# Altium PCB 拓展板.PcbDoc
Units mil, origin at the board's own origin, x right, y up, seen from the top; angles counter-clockwise.
Board outline 3450 x 2375 mil, 2 copper layers (Top Layer, Bottom Layer); 10 components, 64 nets, 169 pads, 23 vias.
Unrouted connection lines stored in the file: 2.
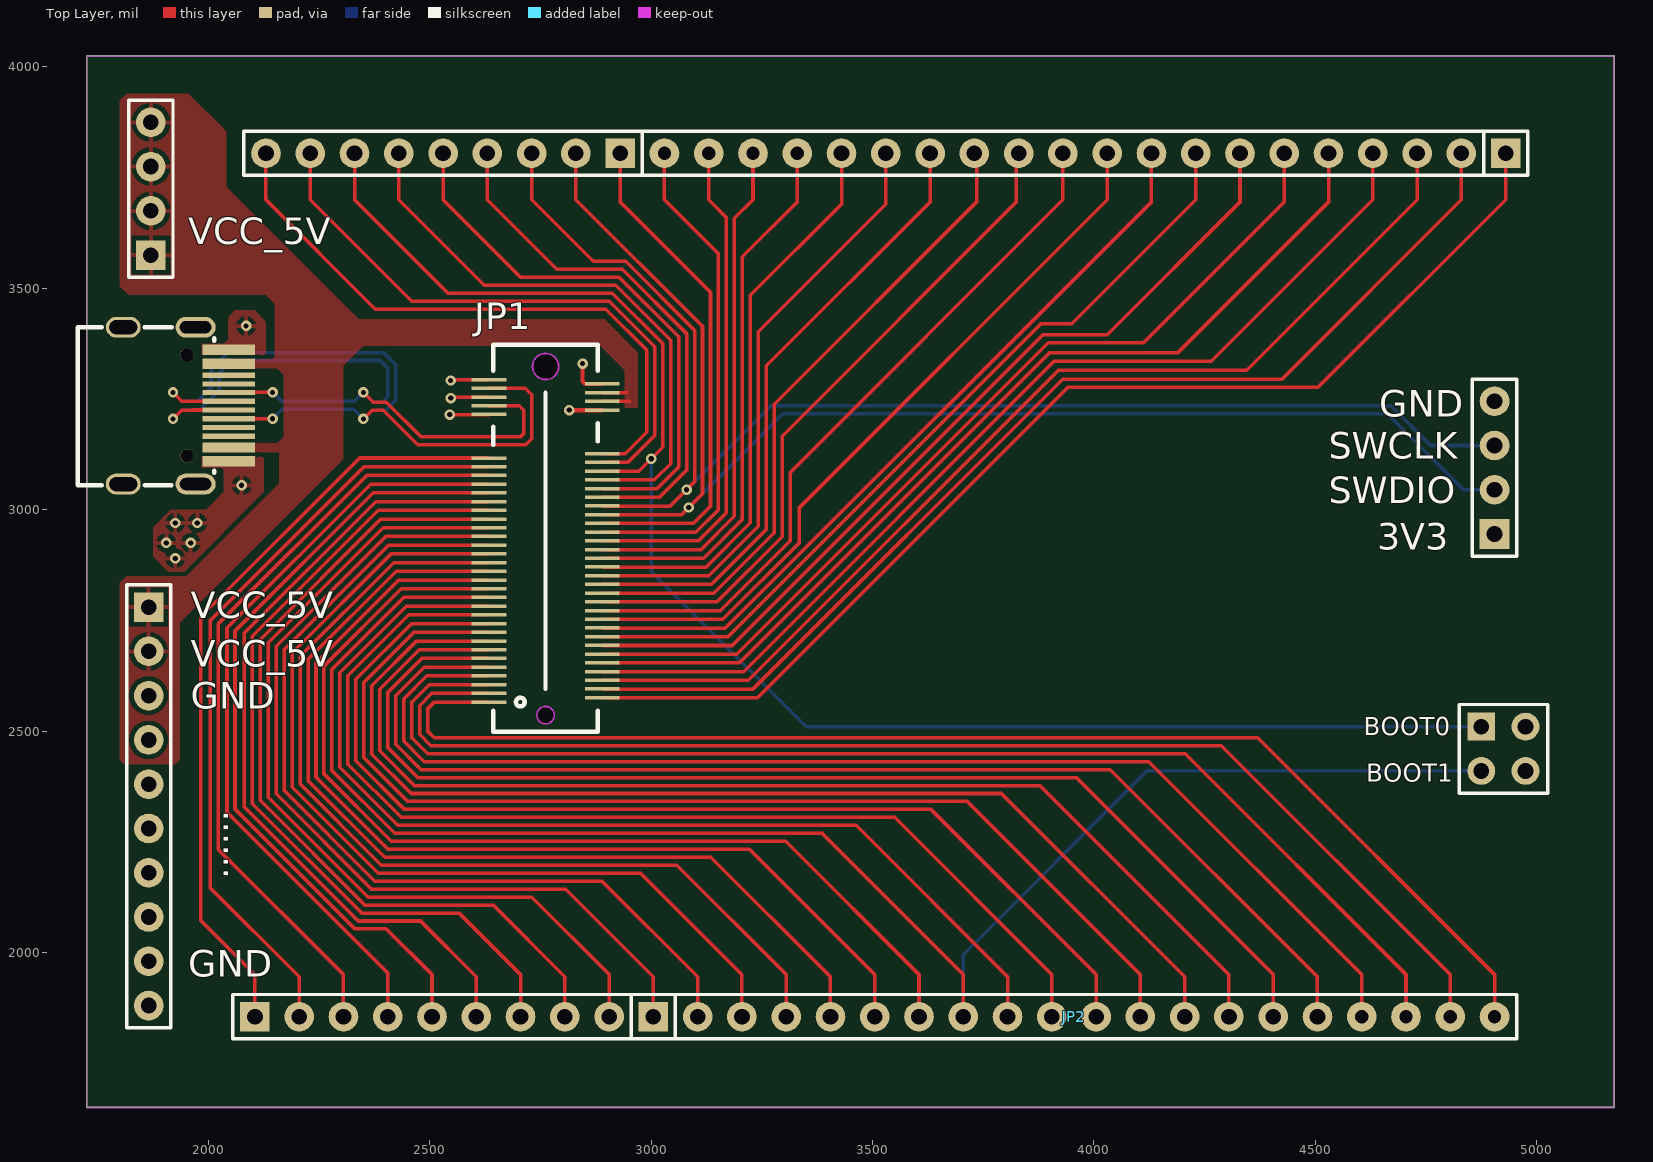
[diagram p0: Top Layer view]
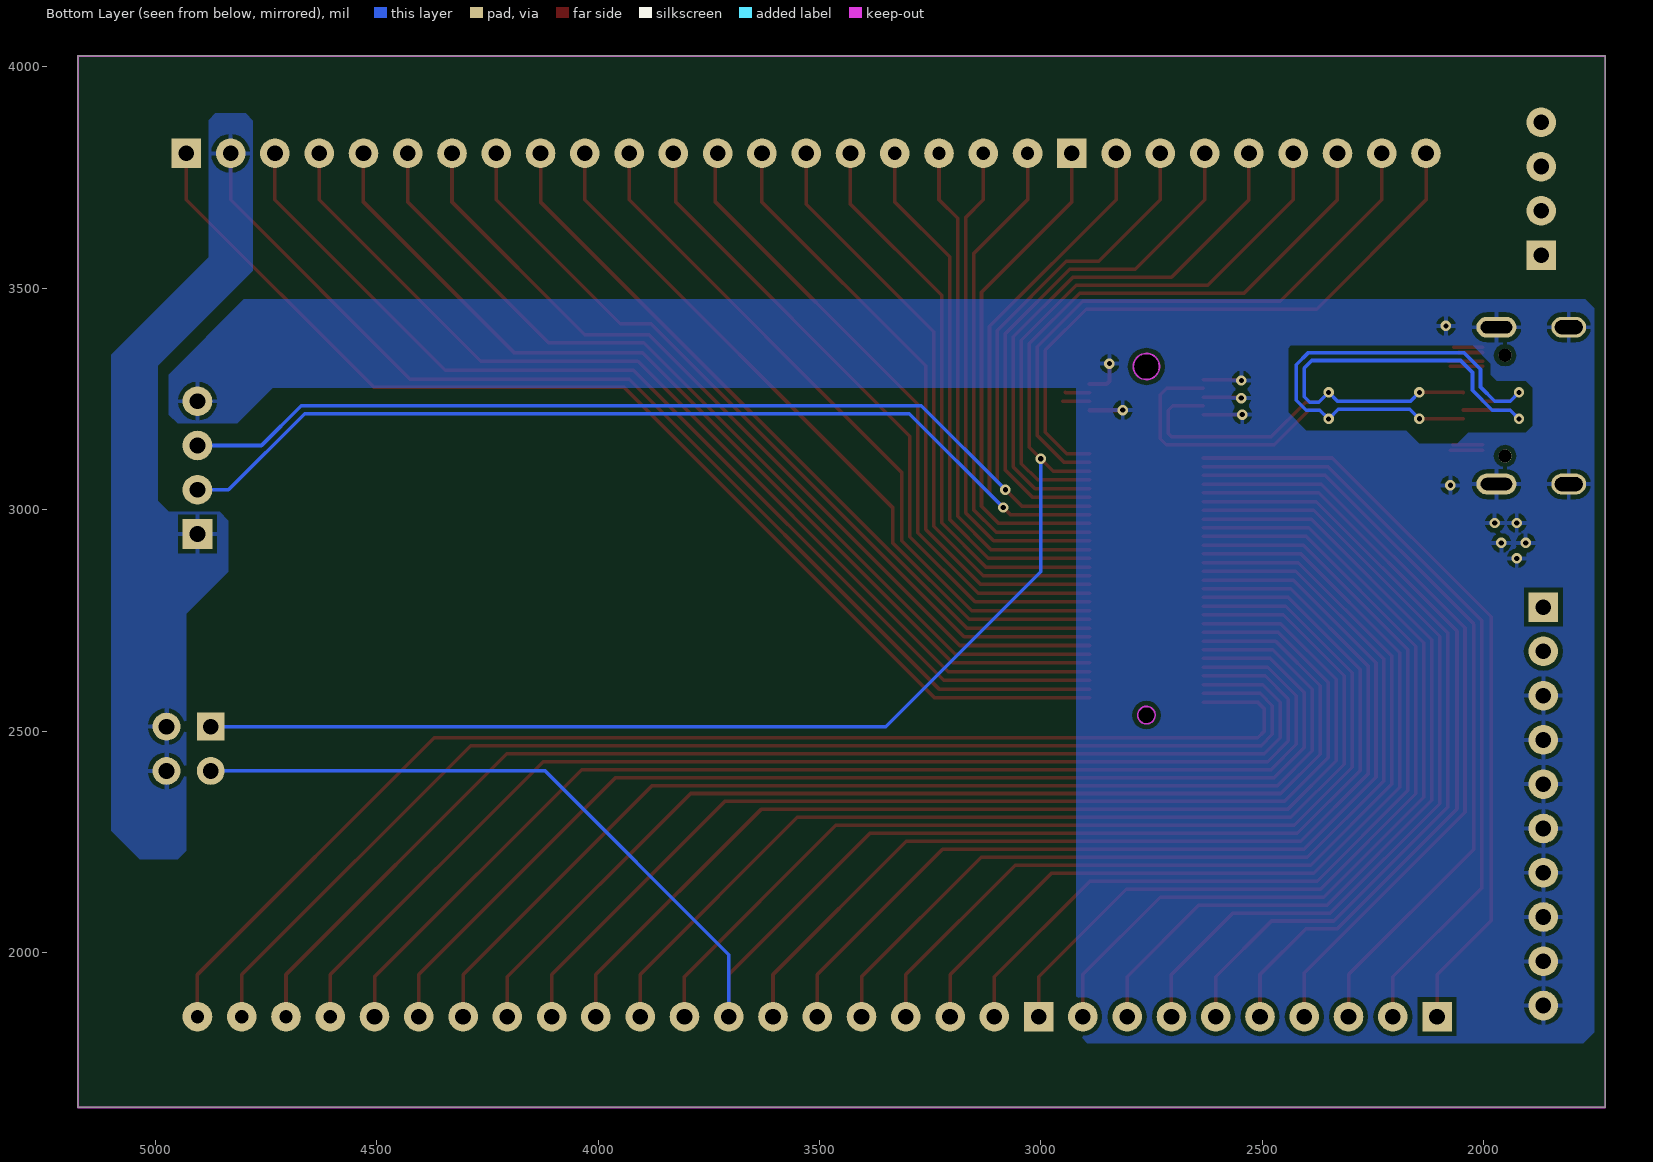
[diagram p1: Bottom Layer view, seen from below]

## Layer stack, top to bottom
Top Solder: solder mask 0.4, Solder Resist, Dk 3.5
Top Layer: signal copper 1.4
Dielectric 1: dielectric 12.6, FR-4, Dk 4.8
Bottom Layer: signal copper 1.4
Bottom Solder: solder mask 0.4, Solder Resist, Dk 3.5

## Board outline
1725,1845 1725,4025 5175,4025 5175,1650 1725,1650

## Design rules (kind name [scope] priority, off if disabled: settings)
Clearance [All] p1: gap=10 ignorepadtopadclearanceinfootprint=FALSE except(0: Arc-Hole Track-Hole SMDPad-Hole THPad-Hole Via-Hole Fill-Hole Poly-Hole Region-Hole Text-Hole)
PolygonConnect [All] p1: connectstyle=Relief reliefconductorwidth=10 reliefentries=4 polygonreliefangle="90 Angle" airgapwidth=10
RoutingVias [All] p1: holewidth=28 width=50 viastyle="Through Hole" minholewidth=28 minwidth=50 maxholewidth=28 maxwidth=50
SolderMaskExpansion [All] p1: expansion=4 istentingtop=FALSE
Width [All] p1: maxlimit=10 minlimit=8 preferedwidth=8 minimp=50.000000 maximp=50.000000 favimp=50.000000
30 further rules are at their usual default settings.

## Components (designator, comment, footprint, x,y, rotation, side; value= is the part's Value field where it differs from the comment)
JP1 "M.2-M-BASE" M.2-MKEY-LI-底座 2554.8,2565.55 r90 top
JP2 "HDR-1X20" HDR2.54-LI-20P 3955,1855 r0 top
JP3 "HDR-1X20" HDR2.54-LI-20P 3980,3805 r180 top
JP4 "HDR-1X9" HDR2.54-LI-9P 2505,1855 r0 top
JP5 "HDR-1X9" HDR2.54-LI-9P 2530,3805 r180 top
JP6 "HDR-1X10" HDR2.54-LI-10P 1865,2330 r270 top
JP7 "HDR-1X4" HDR2.54-LI-4P 1870,3725 r90 top
JP8 "Header2X2" HDR2.54-LI-2x2P 4925,2460 r270 top
JP9 "HDR-1X4" HDR2.54-LI-4P 4905,3095 r90 top
USBC1 "TYPE-C 2.0 -16P" USB-C-SMD_16P 1905,3235 r90 top

## Footprints (in the part's own frame and the unit in brackets; to place one, negate y for a bottom-side part, rotate by r counter-clockwise, add the part's x,y. Pads: shape width x height; smd on the part's side, far side on the other; paste and mask are expansions set on the pad)
HDR2.54-LI-2x2P [mm] "双排排针，2x2脚"
  rect 1.6x1.6 hole 0.9: 1(-1.27,-1.27)
  round 1.6 hole 0.9: 2(-1.27,1.27) 3(1.27,-1.27) 4(1.27,1.27)
  silkscreen extent -2.54,-2.54 2.54,2.54, body extent -2.54,-2.54 2.54,2.54, height 8.5
HDR2.54-LI-4P [mm] "排针，4脚"
  rect 1.7x1.7 hole 0.9: 1(-3.81,0)
  round 1.7 hole 0.9: 2(-1.27,0) 3(1.27,0) 4(3.81,0)
  silkscreen extent -5.08,-1.27 5.08,1.27, body extent -5.08,-1.27 5.08,1.27, height 2.54
HDR2.54-LI-9P [mm] "排针，9脚"
  rect 1.7x1.7 hole 0.9: 1(-10.16,0)
  round 1.7 hole 0.9: 2(-7.62,0) 3(-5.08,0) 4(-2.54,0) 5(0,0) 6(2.54,0) 7(5.08,0) 8(7.62,0) 9(10.16,0)
  silkscreen extent -11.43,-1.27 11.43,1.27, body extent -11.43,-1.27 11.43,1.27, height 2.54
HDR2.54-LI-10P [mm] "排针，10脚   淘宝ID:黄晶宝石   店铺网址:https://shop463601444.taobao.com"
  rect 1.7x1.7 hole 0.9: 1(-11.43,0)
  round 1.7 hole 0.9: 2(-8.89,0) 3(-6.35,0) 4(-3.81,0) 5(-1.27,0) 6(1.27,0) 7(3.81,0) 8(6.35,0) 9(8.89,0) 10(11.43,0)
  silkscreen extent -12.7,-1.27 12.7,1.27, body extent -12.7,-1.27 12.7,1.27, height 2.54
HDR2.54-LI-20P [mm] "排针，20脚"
  rect 1.7x1.7 hole 0.9: 1(-24.13,0)
  round 1.7 hole 0.9: 2(-21.59,0) 3(-19.05,0) 4(-16.51,0) 5(-13.97,0) 6(-11.43,0) 7(-8.89,0) 8(-6.35,0) 9(-3.81,0) 10(-1.27,0) 11(1.27,0) 12(3.81,0) 13(6.35,0) 14(8.89,0) 15(11.43,0) 16(13.97,0)
  round 1.7 hole 0.762: 17(16.51,0) 18(19.05,0) 19(21.59,0) 20(24.13,0)
  silkscreen extent -25.4,-1.27 25.4,1.27, body extent -25.4,-1.27 25.4,1.27, height 2.54
M.2-MKEY-LI-底座 [mm] "立式"
  rect 0.2x2 smd: 1(0,-2) 2(0.25,-8.5) 3(0.5,-2) 4(0.75,-8.5) 5(1,-2) 6(1.25,-8.5) 7(1.5,-2) 8(1.75,-8.5) 9(2,-2) 10(2.25,-8.5) 11(2.5,-2) 12(2.75,-8.5) 13(3,-2) 14(3.25,-8.5) 15(3.5,-2) 16(3.75,-8.5) 17(4,-2) 18(4.25,-8.5) 19(4.5,-2) 20(4.75,-8.5) 21(5,-2) 22(5.25,-8.5) 23(5.5,-2) 24(5.75,-8.5) 25(6,-2) 26(6.25,-8.5) 27(6.5,-2) 28(6.75,-8.5) 29(7,-2) 30(7.25,-8.5) 31(7.5,-2) 32(7.75,-8.5) 33(8,-2) 34(8.25,-8.5) 35(8.5,-2) 36(8.75,-8.5) 37(9,-2) 38(9.25,-8.5) 39(9.5,-2) 40(9.75,-8.5) 41(10,-2) 42(10.25,-8.5) 43(10.5,-2) 44(10.75,-8.5) 45(11,-2) 46(11.25,-8.5) 47(11.5,-2) 48(11.75,-8.5) 49(12,-2) 50(12.25,-8.5) 51(12.5,-2) 52(12.75,-8.5) 53(13,-2) 54(13.25,-8.5) 55(13.5,-2) 56(13.75,-8.5) 57(14,-2) 58(14.25,-8.5) 59(16.5,-2) 60(16.75,-8.5) 61(17,-2) 62(17.25,-8.5) 63(17.5,-2) 64(17.75,-8.5) 65(18,-2) 66(18.25,-8.5) 67(18.5,-2)
  Keep-Out Layer circle w0.1: c-0.75,-5.25 r0.5
  Keep-Out Layer circle w0.1: c19.25,-5.25 r0.75
  silkscreen extent -1.7,-8.25 20.5,-2.25
USB-C-SMD_16P [mm] "封装库来自淘宝ID:黄晶宝石"
  oval 1.2x2.3 hole 0.7 slot 1.8 at 90 deg: 0(-4.5,-1.675) 0(4.5,-1.675)
  oval 1.2x2 hole 0.8 slot 1.6 at 90 deg: 0(-4.5,2.475) 0(4.5,2.475)
  rect 0.3x3 smd: A1(3.35,-3.573) A4(2.55,-3.573) A5(1.25,-3.573) A6(0.25,-3.573) A7(-0.25,-3.573) A8(1.75,-3.573) A9(-2.55,-3.573) A12(-3.35,-3.573) B1(-3.05,-3.573) B4(-2.25,-3.573) B5(-1.75,-3.573) B6(-0.75,-3.573) B7(0.75,-3.573) B8(-1.25,-3.573) B9(2.25,-3.573) B12(3.05,-3.573)
  round 0.75 hole 0.75 unplated: ""(-2.89,-1.175) ""(2.89,-1.175)
  silkscreen extent -4.56,-2.75 4.5,5.08, body extent -4.44,-2.87 4.5,5.03, height 3.25

## Part data
JP1: library part M.2-M底座, "M.2-M底座"
JP2 JP3: library part "Header 20", "20P接插件", BOM名称=20P接插件, 封装库来自淘宝卖家 ID：黄晶宝石=其他店铺购入均为盗, 联系卖家，免费查找封装=唯一出售店铺网址https://shop463601444.taobao.c
JP4 JP5: library part "Header 9", "9P接插件", BOM名称=9P接插件, 封装库来自淘宝卖家 ID：黄晶宝石=其他店铺购入均为盗, 联系卖家，免费查找封装=唯一出售店铺网址https://shop463601444.taobao.c
JP6: library part "Header 10", "10P接插件"
JP7 JP9: library part "Header 4", "4P接插件", BOM名称=4P接插件, 封装库来自淘宝卖家 ID：黄晶宝石=其他店铺购入均为盗, 联系卖家，免费查找封装=唯一出售店铺网址https://shop463601444.taobao.c
JP8: library part "Header 2X2", "2*2P接插件"
USBC1: library part USB2.0_Type-C_16Pin, "USB2.0 Type-C 16Pin  母座"

## Via types
v1: diameter 23.62, hole 11.81, Top Layer to Bottom Layer, 21 vias
v2: diameter 59.06, hole 59.06, Top Layer to Bottom Layer, 1 vias
v3: diameter 39.37, hole 39.37, Top Layer to Bottom Layer, 1 vias

## Nets (pads, with @x,y where several pads share a name; then routed paths per layer and width w, separated by ;. In a path a pad name is that pad's centre, name@x,y a point inside that pad or via, vN(x,y) a via of type N, cw(c..) or ccw(c..) an arc to the next point about the centre after c; other vN are vias at no path point)
+3.3V: JP1.4 JP3.2 JP8.2 JP8.4 JP9.1 | length 2503.1
  Top Layer w8: JP1.4@2889.65,2594.88 3229.88,2594.88 3930,3295 4425,3295 4830,3700 JP3.2
+5: JP1.62 JP1.64 JP6.1 JP6.2 JP7.1 JP7.2 JP7.3 JP7.4 USBC1.A4 USBC1.A9 USBC1.B4 USBC1.B9 | length 406.8
  Top Layer w8: USBC1.B9@2002.27,3323.58 USBC1.B9@2075,3323.58 ; USBC1.A4@2002.27,3335.39 USBC1.A4@2080,3335.39 ; USBC1.A9@2002.43,3134.61 USBC1.A9@2075,3134.61 ; USBC1.B4@2002.43,3146.42 USBC1.B4@2070,3146.42 ; JP1.62@2889.65,3244.49 2949.49,3244.49 2950,3245 ; JP1.64@2889.65,3264.17 2944.17,3264.17 2945,3265
BOOT0: JP1.54 JP5.7 JP8.1 | length 3603.6
  Top Layer w8: JP5.7 2330,3700 2541,3489 2912.48,3489 3026,3375.48 3026,3141 v1(3000,3115) 2972.01,3087.01 JP1.54@2889.65,3087.01
  Bottom Layer w8: v1(3000,3115) 3000,2860 3350,2510 JP8.1
BOOT1: JP1.25 JP2.8 JP8.3 | length 3844.4
  Top Layer w8: JP1.25 2441.3,2801.77 2279,2639.47 2279,2410.53 2420.53,2269 3386,2269 3705,1950 JP2.8
  Bottom Layer w8: JP2.8 3705,1995 4120,2410 JP8.3
GND: JP1.59 JP1.60 JP1.63 JP1.66 JP1.67 JP6.3 JP6.4 JP6.5 JP6.6 JP6.7 JP6.8 JP6.9 JP6.10 JP9.4 USBC1.0 USBC1.A1 USBC1.A12 USBC1.B1 USBC1.B12 | length 543.9
  Top Layer w8: USBC1.B12@2002.37,3355.08 USBC1.B12 USBC1.B12@2055.85,3355.08 ; USBC1.A1@2002.37,3366.89 USBC1.A1 USBC1.A1@2067.66,3366.89 ; v1(2545.04,3214.96) JP1.59@2633.54,3214.96 ; v1(2546.85,3291.85) 2548.7,3293.7 JP1.67@2633.54,3293.7 ; v1(2547.17,3252.17) 2549.33,3254.33 JP1.63@2633.54,3254.33
  Top Layer w10: v1(2815,3225) JP1.60 JP1.60@2889.65,3224.8 ; v1(2845,3329.94) 2845,3290 2851.14,3283.86 JP1.66@2889.65,3283.86
  other v1: 1925,2890 1905,2925 1960,2925 1925,2970 1975,2970 2075,3055 2085,3415
NetJP1_1: JP1.1 JP2.20 | length 2927.8
  Top Layer w8: JP1.1 2510.55,2565.55 2495,2550 2495,2500 2510,2485 4370,2485 4905,1950 JP2.20
NetJP1_2: JP1.2 JP3.1 | length 2611.3
  Top Layer w8: JP1.2@2889.65,2575.2 3240.2,2575.2 3942,3277 4507,3277 4930,3700 JP3.1
NetJP1_3: JP1.3 JP2.19 | length 2880.7
  Top Layer w8: JP1.3 2504.78,2585.24 2477,2557.46 2477,2492.54 2502.54,2467 4288,2467 4805,1950 JP2.19
NetJP1_5: JP1.5 JP2.18 | length 2833.6
  Top Layer w8: JP1.5 2499.01,2604.92 2459,2564.91 2459,2485.09 2495.09,2449 4206,2449 4705,1950 JP2.18
NetJP1_6: JP1.6 JP3.3 | length 2395
  Top Layer w8: JP1.6@2889.65,2614.57 3219.57,2614.57 3920,3315 4345,3315 4730,3700 JP3.3
NetJP1_7: JP1.7 JP2.17 | length 2786.5
  Top Layer w8: JP1.7 2493.24,2624.61 2441,2572.37 2441,2477.63 2487.63,2431 4124,2431 4605,1950 JP2.17
NetJP1_8: JP1.8 JP3.4 | length 2286.8
  Top Layer w8: JP1.8@2889.65,2634.25 3209.25,2634.25 3910,3335 4265,3335 4630,3700 JP3.4
NetJP1_9: JP1.9 JP2.16 | length 2736.4
  Top Layer w8: JP1.9 2487.47,2644.29 2423,2579.82 2423,2470.18 2480.18,2413 4037,2413 4505,1945 JP2.16
NetJP1_10: JP1.10 JP3.5 | length 2181.6
  Top Layer w8: JP1.10@2889.65,2653.94 3199.39,2653.94 3900.46,3355 4190,3355 4530,3695 JP3.5
NetJP1_11: JP1.11 JP2.15 | length 2692.2
  Top Layer w8: JP1.11 2481.7,2663.98 2405,2587.28 2405,2462.72 2472.72,2395 3960,2395 4405,1950 JP2.15
NetJP1_12: JP1.12 JP3.6 | length 2073.4
  Top Layer w8: JP1.12@2889.65,2673.62 3193.62,2673.62 3897,3377 4112,3377 4430,3695 JP3.6
NetJP1_13: JP1.13 JP2.14 | length 2645.1
  Top Layer w8: JP1.13 2475.93,2683.66 2387,2594.73 2387,2455.27 2465.27,2377 3878,2377 4305,1950 JP2.14
NetJP1_14: JP1.14 JP3.7 | length 1965.3
  Top Layer w8: JP1.14@2889.65,2693.31 3183.31,2693.31 3885,3395 4030,3395 4330,3695 JP3.7
NetJP1_15: JP1.15 JP2.13 | length 2595.1
  Top Layer w8: JP1.15 2470.16,2703.35 2369,2602.19 2369,2447.81 2457.81,2359 3791,2359 4205,1945 JP2.13
NetJP1_16: JP1.16 JP3.8 | length 1854.2
  Top Layer w8: JP1.16@2889.65,2712.99 3173.45,2712.99 3880.46,3420 3950,3420 4230,3700 JP3.8
NetJP1_17: JP1.17 JP2.12 | length 2550.9
  Top Layer w8: JP1.17 2464.39,2723.03 2351,2609.65 2351,2440.35 2450.35,2341 3714,2341 4105,1950 JP2.12
NetJP1_18: JP1.18 JP3.9 | length 1749
  Top Layer w8: JP1.18@2889.65,2732.68 3167.68,2732.68 4130,3695 JP3.9
NetJP1_19: JP1.19 JP2.11 | length 2503.8
  Top Layer w8: JP1.19 2458.61,2742.72 2333,2617.1 2333,2432.9 2442.9,2323 3632,2323 4005,1950 JP2.11
NetJP1_20: JP1.20 JP3.10 | length 1684.5
  Top Layer w8: JP1.20@2889.65,2752.36 3161.91,2752.36 3335,2925.46 3335,3005 4030,3700 JP3.10
NetJP1_21: JP1.21 JP2.10 | length 2456.7
  Top Layer w8: JP1.21 2452.84,2762.4 2315,2624.56 2315,2425.44 2435.44,2305 3550,2305 3905,1950 JP2.10
NetJP1_22: JP1.22 JP3.11 | length 1620
  Top Layer w8: JP1.22@2889.65,2772.05 3156.14,2772.05 3314,2929.91 3314,3084 3930,3700 JP3.11
NetJP1_23: JP1.23 JP2.9 | length 2406.7
  Top Layer w8: JP1.23 2447.07,2782.09 2297,2632.01 2297,2417.99 2427.99,2287 3463,2287 3805,1945 JP2.9
NetJP1_24: JP1.24 JP3.12 | length 1554.5
  Top Layer w8: JP1.24@2889.65,2791.73 3148.63,2791.73 3296,2939.1 3296,3166 3825,3695 3825,3800 JP3.12
NetJP1_26: JP1.26 JP3.13 | length 1493.4
  Top Layer w8: JP1.26@2889.65,2811.42 3141.51,2811.42 3278,2947.9 3278,3238 3735,3695 3735,3800 JP3.13
NetJP1_27: JP1.27 JP2.7 | length 2315.4
  Top Layer w8: JP1.27 2435.53,2821.46 2261,2646.93 2261,2403.07 2413.07,2251 3304,2251 3605,1950 JP2.7
NetJP1_28: JP1.28 JP3.14 | length 1424.7
  Top Layer w8: JP1.28@2889.65,2831.1 3135.74,2831.1 3260,2955.36 3260,3325 3630,3695 JP3.14
NetJP1_29: JP1.29 JP2.6 | length 2268.2
  Top Layer w8: JP1.29 2429.76,2841.14 2243,2654.38 2243,2395.62 2405.62,2233 3222,2233 3505,1950 JP2.6
NetJP1_30: JP1.30 JP3.15 | length 1360.2
  Top Layer w8: JP1.30@2889.65,2850.79 3129.97,2850.79 3242,2962.81 3242,3402 3530,3690 JP3.15
NetJP1_31: JP1.31 JP2.5 | length 2218.2
  Top Layer w8: JP1.31 2423.99,2860.83 2225,2661.84 2225,2388.16 2398.16,2215 3135,2215 3405,1945 JP2.5
NetJP1_32: JP1.32 JP3.16 | length 1295.7
  Top Layer w8: JP1.32@2889.65,2870.47 3124.2,2870.47 3224,2970.27 3224,3484 3430,3690 JP3.16
NetJP1_33: JP1.33 JP2.4 | length 2174
  Top Layer w8: JP1.33 2418.22,2880.51 2207,2669.29 2207,2380.71 2390.71,2197 3058,2197 3305,1950 JP2.4
NetJP1_34: JP1.34 JP3.17 | length 1231.3
  Top Layer w8: JP1.34@2889.65,2890.16 3118.43,2890.16 3206,2977.73 3206,3571 3330,3695 JP3.17
NetJP1_35: JP1.35 JP2.3 | length 2126.8
  Top Layer w8: JP1.35@2633.54,2900 2412.25,2900 2189,2676.75 2189,2373.25 2383.25,2179 2976,2179 3205,1950 JP2.3
NetJP1_36: JP1.36 JP3.18 | length 1166.8
  Top Layer w8: JP1.36@2889.65,2909.84 3112.66,2909.84 3188,2985.18 3188,3658 3230,3700 JP3.18
NetJP1_37: JP1.37 JP2.2 | length 2076.9
  Top Layer w8: JP1.37 2406.68,2919.88 2171,2684.2 2171,2365.8 2375.8,2161 2889,2161 3105,1945 JP2.2
NetJP1_38: JP1.38 JP3.19 | length 1135.4
  Top Layer w8: JP1.38@2889.65,2929.53 3106.89,2929.53 3170,2992.64 3170,3660 3130,3700 JP3.19
NetJP1_39: JP1.39 JP2.1 | length 2029.8
  Top Layer w8: JP1.39 2400.91,2939.57 2153,2691.66 2153,2358.34 2368.34,2143 2807,2143 3005,1945 JP2.1
NetJP1_40: JP1.40 JP3.20 | length 1138.9
  Top Layer w8: JP1.40@2889.65,2949.21 3101.12,2949.21 3152,3000.09 3152,3578 3030,3700 JP3.20
NetJP1_41: JP1.41 JP4.9 | length 1985.6
  Top Layer w8: JP1.41 2395.14,2959.25 2135,2699.12 2135,2350.88 2360.88,2125 2730,2125 2905,1950 JP4.9
NetJP1_42: JP1.42 JP5.1 | length 1142.3
  Top Layer w8: JP1.42@2889.65,2968.9 3095.35,2968.9 3134,3007.55 3134,3491 2930,3695 JP5.1
NetJP1_43: JP1.43 JP4.8 | length 1935.5
  Top Layer w8: JP1.43 2389.37,2978.94 2117,2706.57 2117,2343.43 2353.43,2107 2643,2107 2805,1945 JP4.8
NetJP1_45: JP1.45 JP4.7 | length 1891.4
  Top Layer w8: JP1.45 2383.59,2998.62 2099,2714.03 2099,2335.97 2345.97,2089 2566,2089 2705,1950 JP4.7
NetJP1_47: JP1.47 JP4.6 | length 1841.3
  Top Layer w8: JP4.6 2605,1945 2479,2071 2338.52,2071 2081,2328.52 2081,2721.48 2377.82,3018.31 JP1.47
NetJP1_48: JP1.48 JP5.4 | length 1204.6
  Top Layer w8: JP5.4 2630,3700 2787,3543 2934.85,3543 3080,3397.85 3080,3089.09 3018.86,3027.95 JP1.48@2889.65,3027.95
NetJP1_49: JP1.49 JP4.5 | length 1799.6
  Top Layer w8: JP4.5 2505,1950 2402,2053 2331.06,2053 2060,2324.06 2060,2725.94 2372.05,3037.99 JP1.49
NetJP1_50: JP1.50 JP5.5 | length 1251.7
  Top Layer w8: JP5.5 2530,3700 2705,3525 2927.39,3525 3062,3390.39 3062,3096.54 3013.09,3047.64 JP1.50@2889.65,3047.64
NetJP1_51: JP1.51 JP4.4 | length 1754.6
  Top Layer w8: JP4.4 2405,1953.61 2042,2316.61 2042,2733.39 2366.28,3057.68 JP1.51
NetJP1_52: JP1.52 JP5.6 | length 1298.8
  Top Layer w8: JP5.6 2430,3700 2623,3507 2919.93,3507 3044,3382.93 3044,3104 3007.32,3067.32 JP1.52@2889.65,3067.32
NetJP1_53: JP1.53 JP4.3 | length 1754.9
  Top Layer w8: JP4.3 2305,1950 2021.77,2233.23 2021.77,2741.77 2357.36,3077.36 JP1.53
NetJP1_55: JP1.55 JP4.2 | length 1751.5
  Top Layer w8: JP4.2 2205,1945 2003.69,2146.31 2003.69,2749.26 2351.28,3096.85 JP1.55@2633.54,3096.85
NetJP1_56: JP1.56 JP5.8 | length 1364.5
  Top Layer w8: JP5.8 2230,3700 2459,3471 2905.02,3471 3008,3368.02 3008,3167.54 2947.15,3106.69 JP1.56@2889.65,3106.69
NetJP1_57: JP1.57 JP4.1 | length 1752.8
  Top Layer w8: JP4.1 2105,1950 1982.88,2072.12 1982.88,2757.88 2341.73,3116.73 JP1.57
NetJP1_58: JP1.58 JP5.9 | length 1411.7
  Top Layer w8: JP5.9 2130,3700 2377,3453 2897.57,3453 2990,3360.57 2990,3175 2941.38,3126.38 JP1.58@2889.65,3126.38
NetJP1_61: JP1.61 USBC1.A7 USBC1.B7 | length 1701.5
  Top Layer w8: v1(1920,3205) 1940,3225 1965.64,3225 1965.8,3225.16 USBC1.A7 ; USBC1.B7 2046.14,3265 v1(2145,3265) ; v1(2350,3265) 2372,3243 2402,3243 2480,3165 2705,3165 2712,3172 2712,3225 2702.16,3234.84 JP1.61
  Bottom Layer w8: v1(1920,3205) 1940,3225 1980.46,3225 2025,3269.54 2025,3310 2052,3337 2388,3337 2405,3320 2405,3255 2393,3243 2372,3243 v1(2350,3265) 2330,3245 2165,3245 v1(2145,3265)
NetJP1_65: JP1.65 USBC1.A6 USBC1.B6 | length 1804
  Top Layer w8: v1(1920,3265) 1940,3245 2002.28,3245 USBC1.A6@2002.43,3244.84 ; USBC1.B6 v1(2145,3205.47) ; v1(2350,3205) 2370,3225 2394.54,3225 2472.54,3147 2717,3147 2730,3160 2730,3260 2715.79,3274.21 JP1.65
  Bottom Layer w8: v1(1920,3265) 1940,3245 1975,3245 2007,3277 2007,3317.46 2044.54,3355 2395.46,3355 2423,3327.46 2423,3247.54 2400.46,3225 2370,3225 v1(2350,3205) 2328,3227 2167,3227 2145.47,3205.47 v1(2145,3205.47)
NetUSBC1_A5: USBC1.A5 USBC1.B5
NetUSBC1_A8: USBC1.A8 USBC1.B8
SWCLK: JP1.46 JP5.3 JP9.3 | length 3109.4
  Top Layer w8: JP5.3 2730,3700 2869,3561 2942.3,3561 3098,3405.3 3098,3063 v1(3080,3045) 3043.27,3008.27 JP1.46@2889.65,3008.27
  Bottom Layer w8: v1(3080,3045) 3270,3235 4670.46,3235 4760.46,3145 JP9.3
SWDIO: JP1.44 JP5.2 JP9.2 | length 3112.5
  Top Layer w8: JP5.2 2830,3700 3116,3414 3116,3036 v1(3085,3005) 3068.58,2988.58 JP1.44@2889.65,2988.58
  Bottom Layer w8: v1(3085,3005) 3297,3217 4663,3217 4835,3045 JP9.2
pads on no net: USBC1.
copper on no net:
  other v2: 2761.5,3323.43
  other v3: 2761.5,2536.02

## Polygon pours and split planes (outlines as drawn)
GND on Top Layer "Top Layer-GND" (solid, pour order 65): 2125,3040 2125,3115 2120,3120 1985,3120 1985,3095 2030,3095 2035,3090 2035,3040 1995,3000 1915,3000 1875,2960 1875,2895 1910,2860 1945,2860
GND on Top Layer "Top Layer-GND 1" (solid, pour order 59): 1985,3350 2125,3350 2130,3355 2130,3425 2105,3450 2060,3450 2045,3435 2045,3385 2035,3375 1985,3375
+5 on Top Layer "+5_L01_P057" (solid, pour order 57): 2295,3105 2305,3115 2305,3325 2350,3370 2885,3370 2940,3315 2940,3230 2970,3230 2970,3355 2895,3430 2340,3430 2235,3535 2040,3730 2040,3855 1955,3940 1815,3940 1800,3925 1800,3505 1820,3485 2130,3485 2150,3465 2150,3345 2145,3340 2040,3340 2040,3320 2155,3320 2170,3305 2170,3165 2155,3150 2040,3150 2040,3130 2160,3130 2160,3060 1950,2850 1815,2850 1800,2835 1800,2435 1810,2425 1925,2425 1935,2435 1935,2745
GND on Bottom Layer "Bottom Layer-GND" (solid, pour order 73): 2920,1820 2920,3275 4735,3275 4815,3195 4950,3195 4970,3215 4970,3305 4800,3475 2890,3475 2110,3475 1770,3475 1750,3455 1750,3015 1750,1820 1775,1795 2895,1795
+3.3V on Bottom Layer "Bottom Layer-+3.3V" (solid, pour order 67): 4865,3895 4880,3880 4880,3570 5100,3350 5100,2275 5035,2210 4950,2210 4930,2230 4930,2765 4835,2860 4835,2975 4855,2995 4970,2995 4995,3020 4995,3325 4780,3540 4780,3879.03 4795.97,3895

## Keep-outs
Keep-Out Layer:
  lines w3.94: 1725,1650 5175,1650 5175,4025 1725,4025 1725,1650

## Other copper
Bottom Layer:
  pour cut-out: 2035,3175 2060,3150 2145,3150 2175,3180 2400,3180 2440,3220 2440,3365 2435,3370 2025,3370 1985,3330 1985,3305 1970,3290 1905,3290 1890,3275 1890,3190 1905,3175

## Silkscreen, mask and mechanical layers (free items; w line width, h text height)
Top Overlay:
  text "VCC_5V" at 1955,3600 h60
  text "GND" at 4645,3210 h60
  text "SWCLK" at 4530,3115 h60
  text "SWDIO" at 4530,3015 h60
  text "3V3" at 4640,2910 h60
  text "VCC_5V" at 1960,2755 h60
  text "VCC_5V" at 1960,2645 h60
  text "GND" at 1960,2550 h60
  text "......" at 2045,2165 h60 r90
  text "GND" at 1955,1945 h60

## Text inside footprints (layer, text, board x,y; h text height)
JP8: Top Overlay "BOOT1" at 4615,2385 h40; Top Overlay "BOOT0" at 4610,2490 h40